# Altium PCB UWB_DWM1000_ParaChina.PcbDoc
Units mil, origin at the board's own origin, x right, y up, seen from the top; angles counter-clockwise.
Board outline 1968.5 x 2362.2 mil, 4 copper layers (Component Side, Signal Layer 2, Signal Layer 1, Solder Side), stack 33.235 mil thick; 66 components, 69 nets, 281 pads, 109 vias.
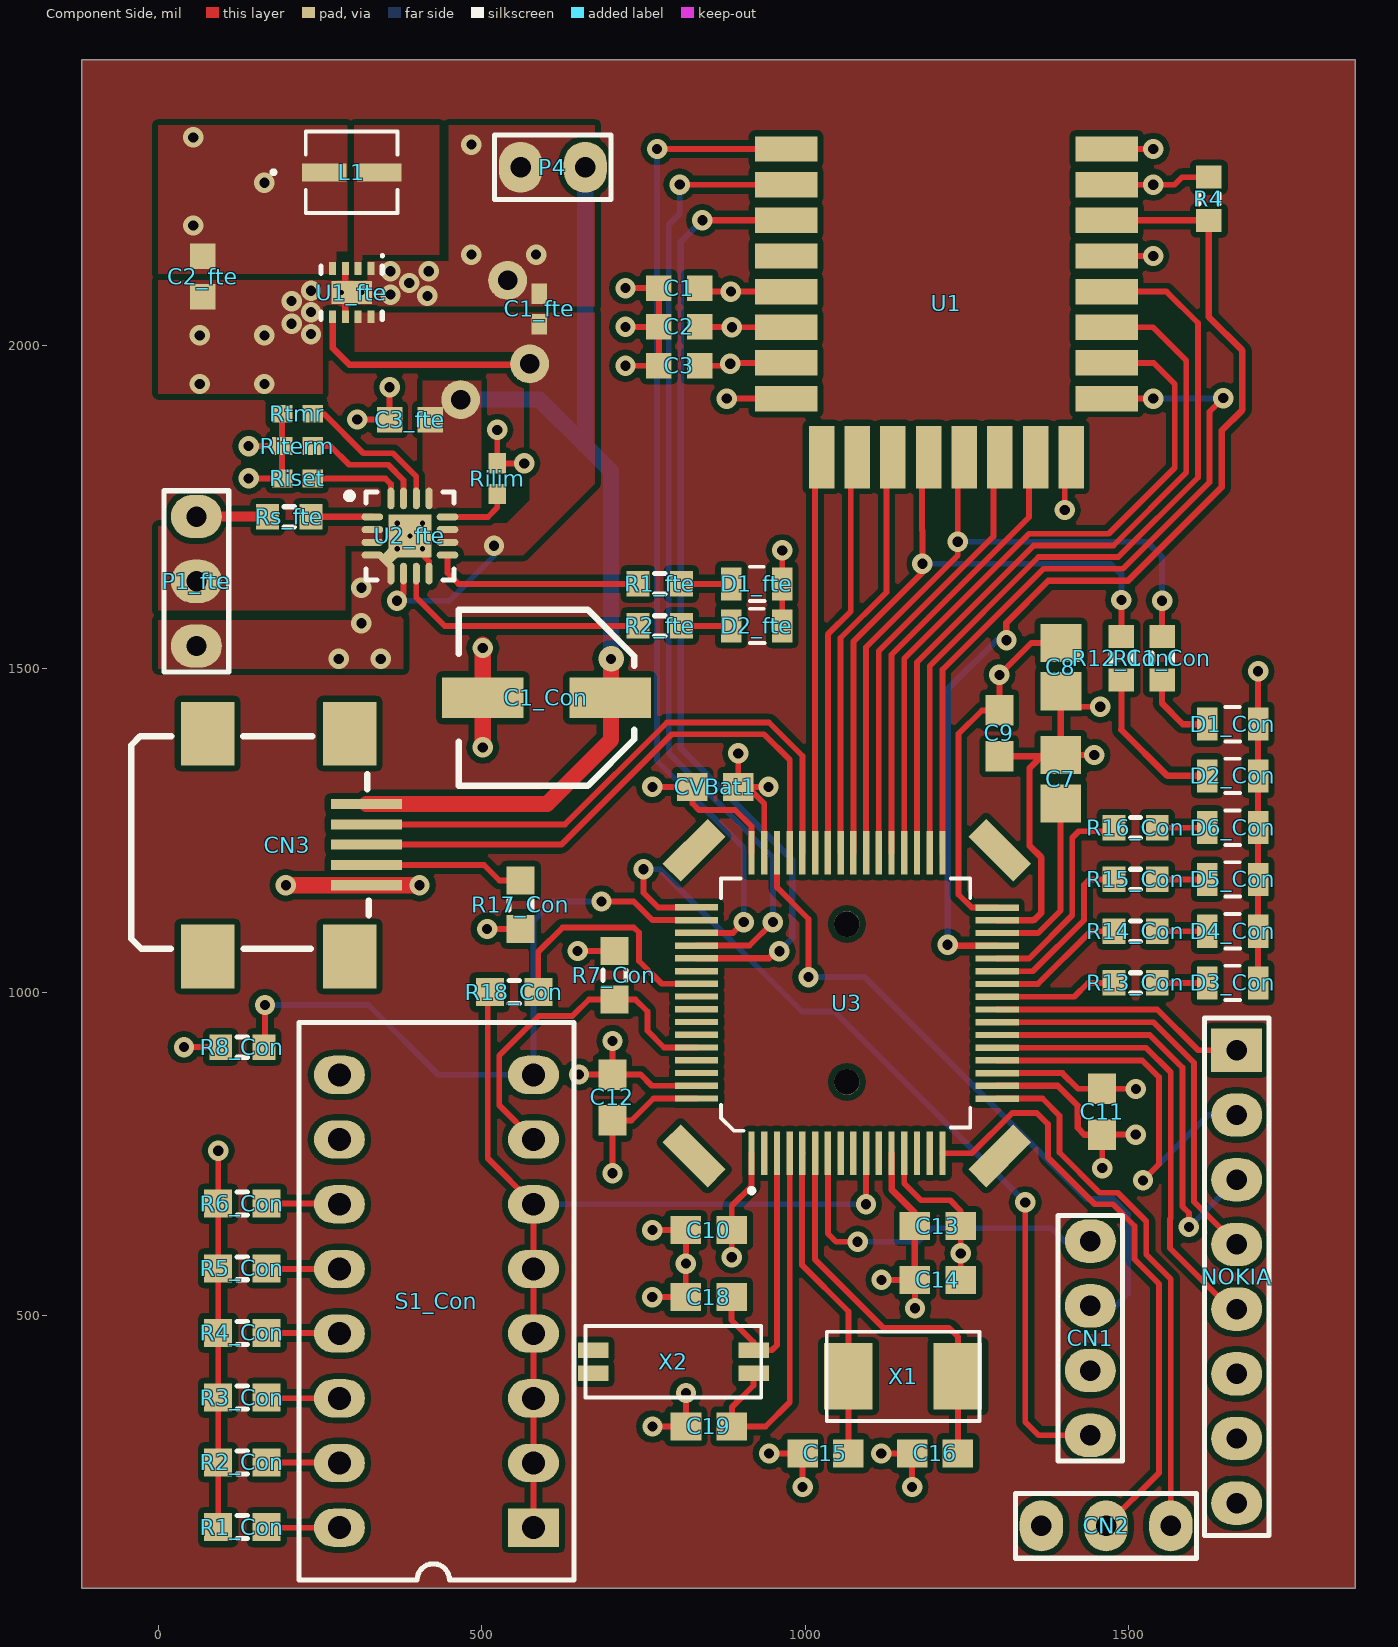
[diagram p0: Component Side view]
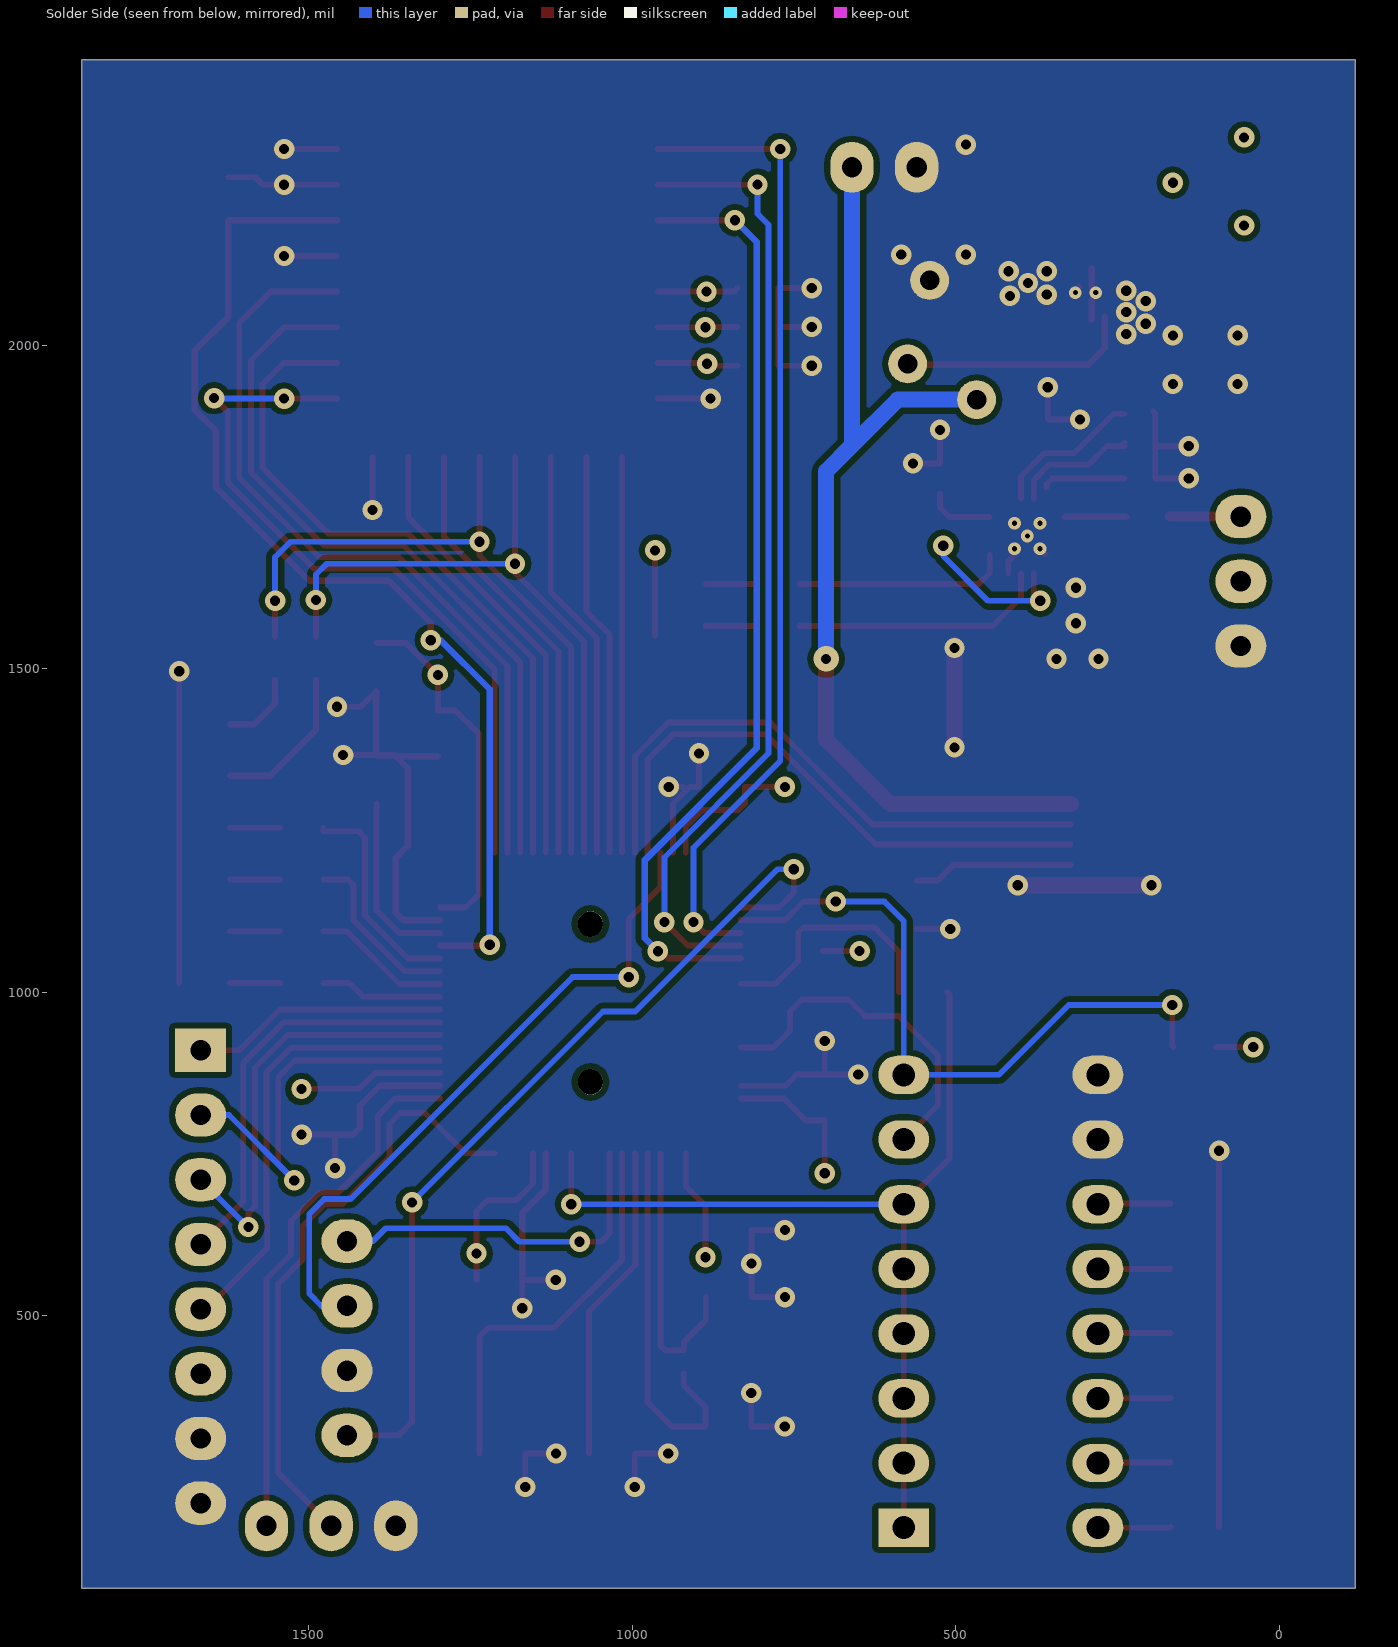
[diagram p1: Solder Side view, seen from below]
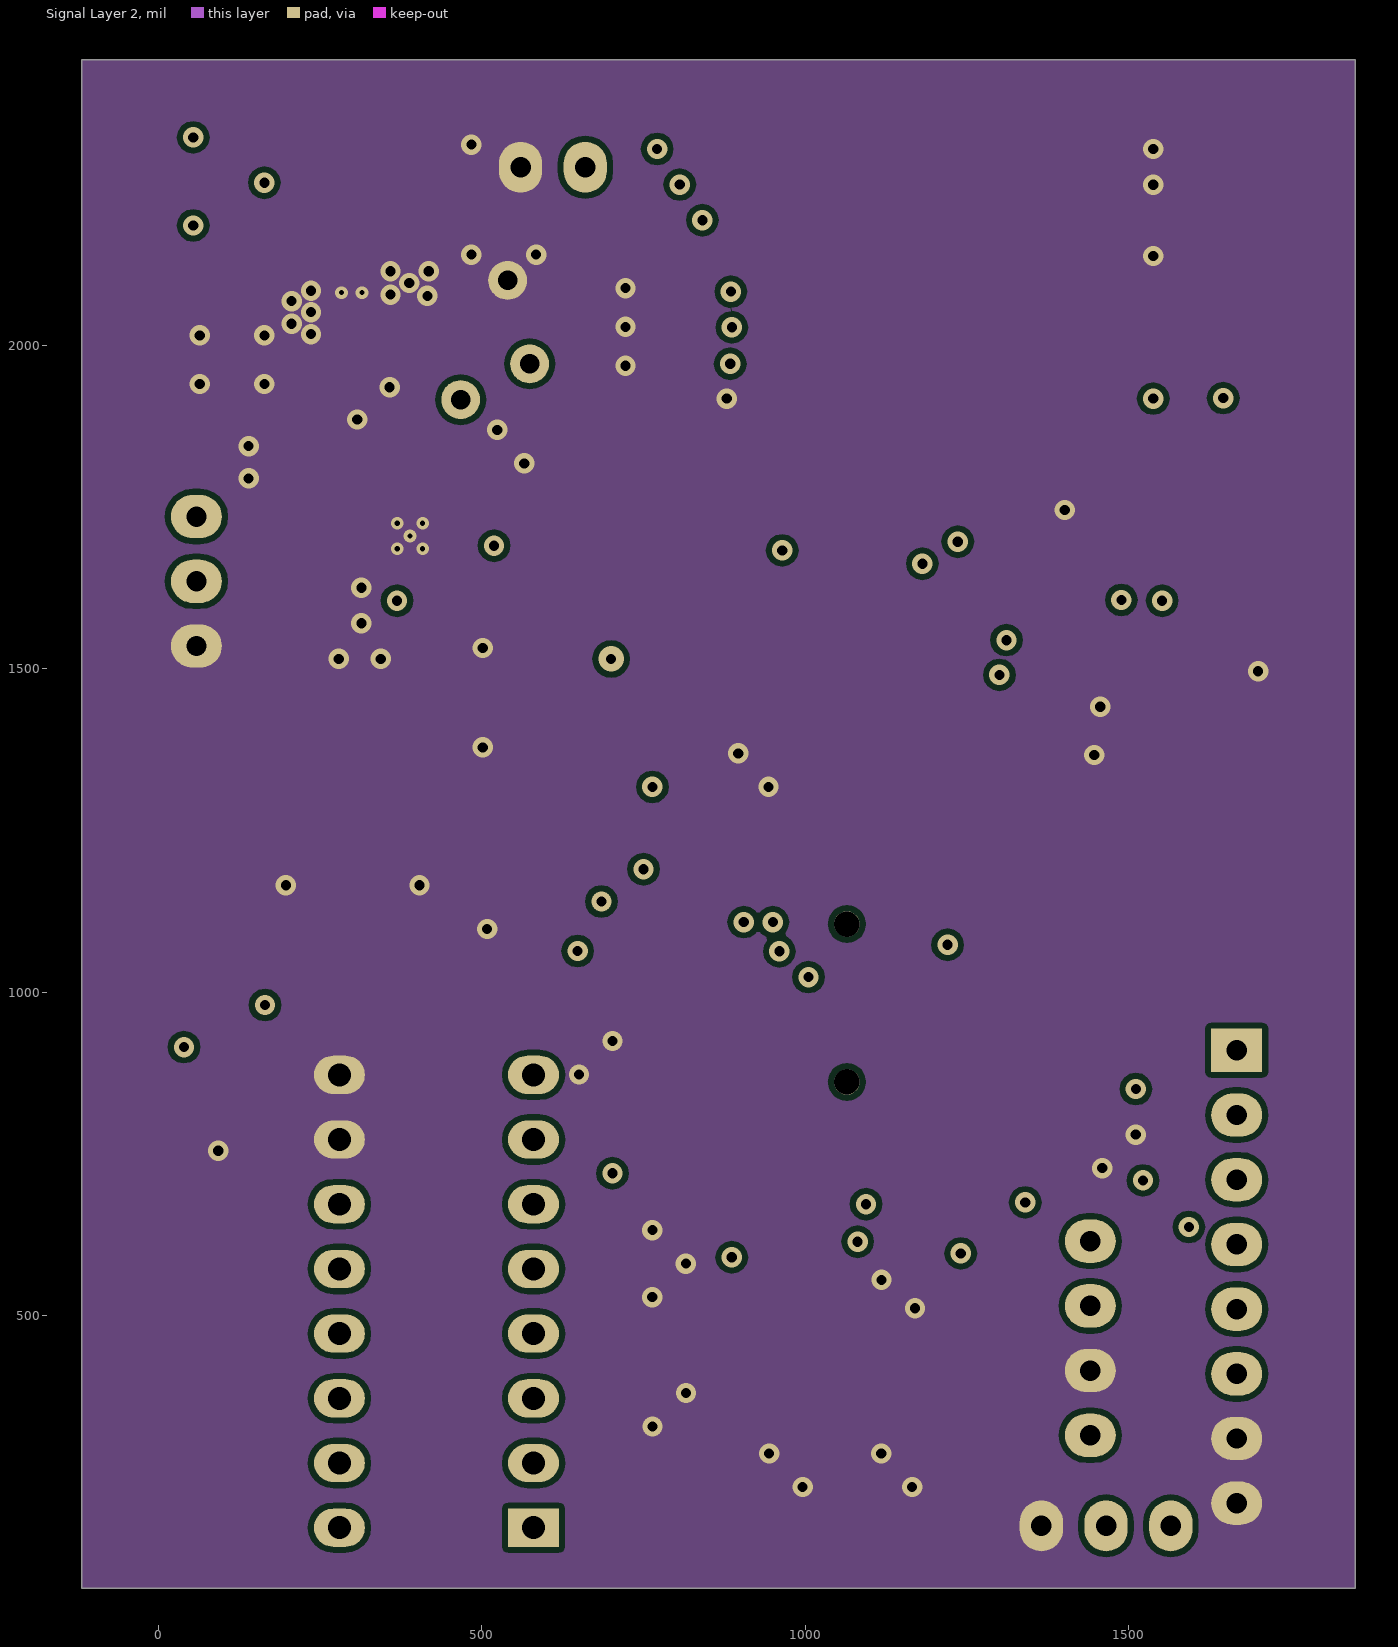
[diagram p2: Signal Layer 2]
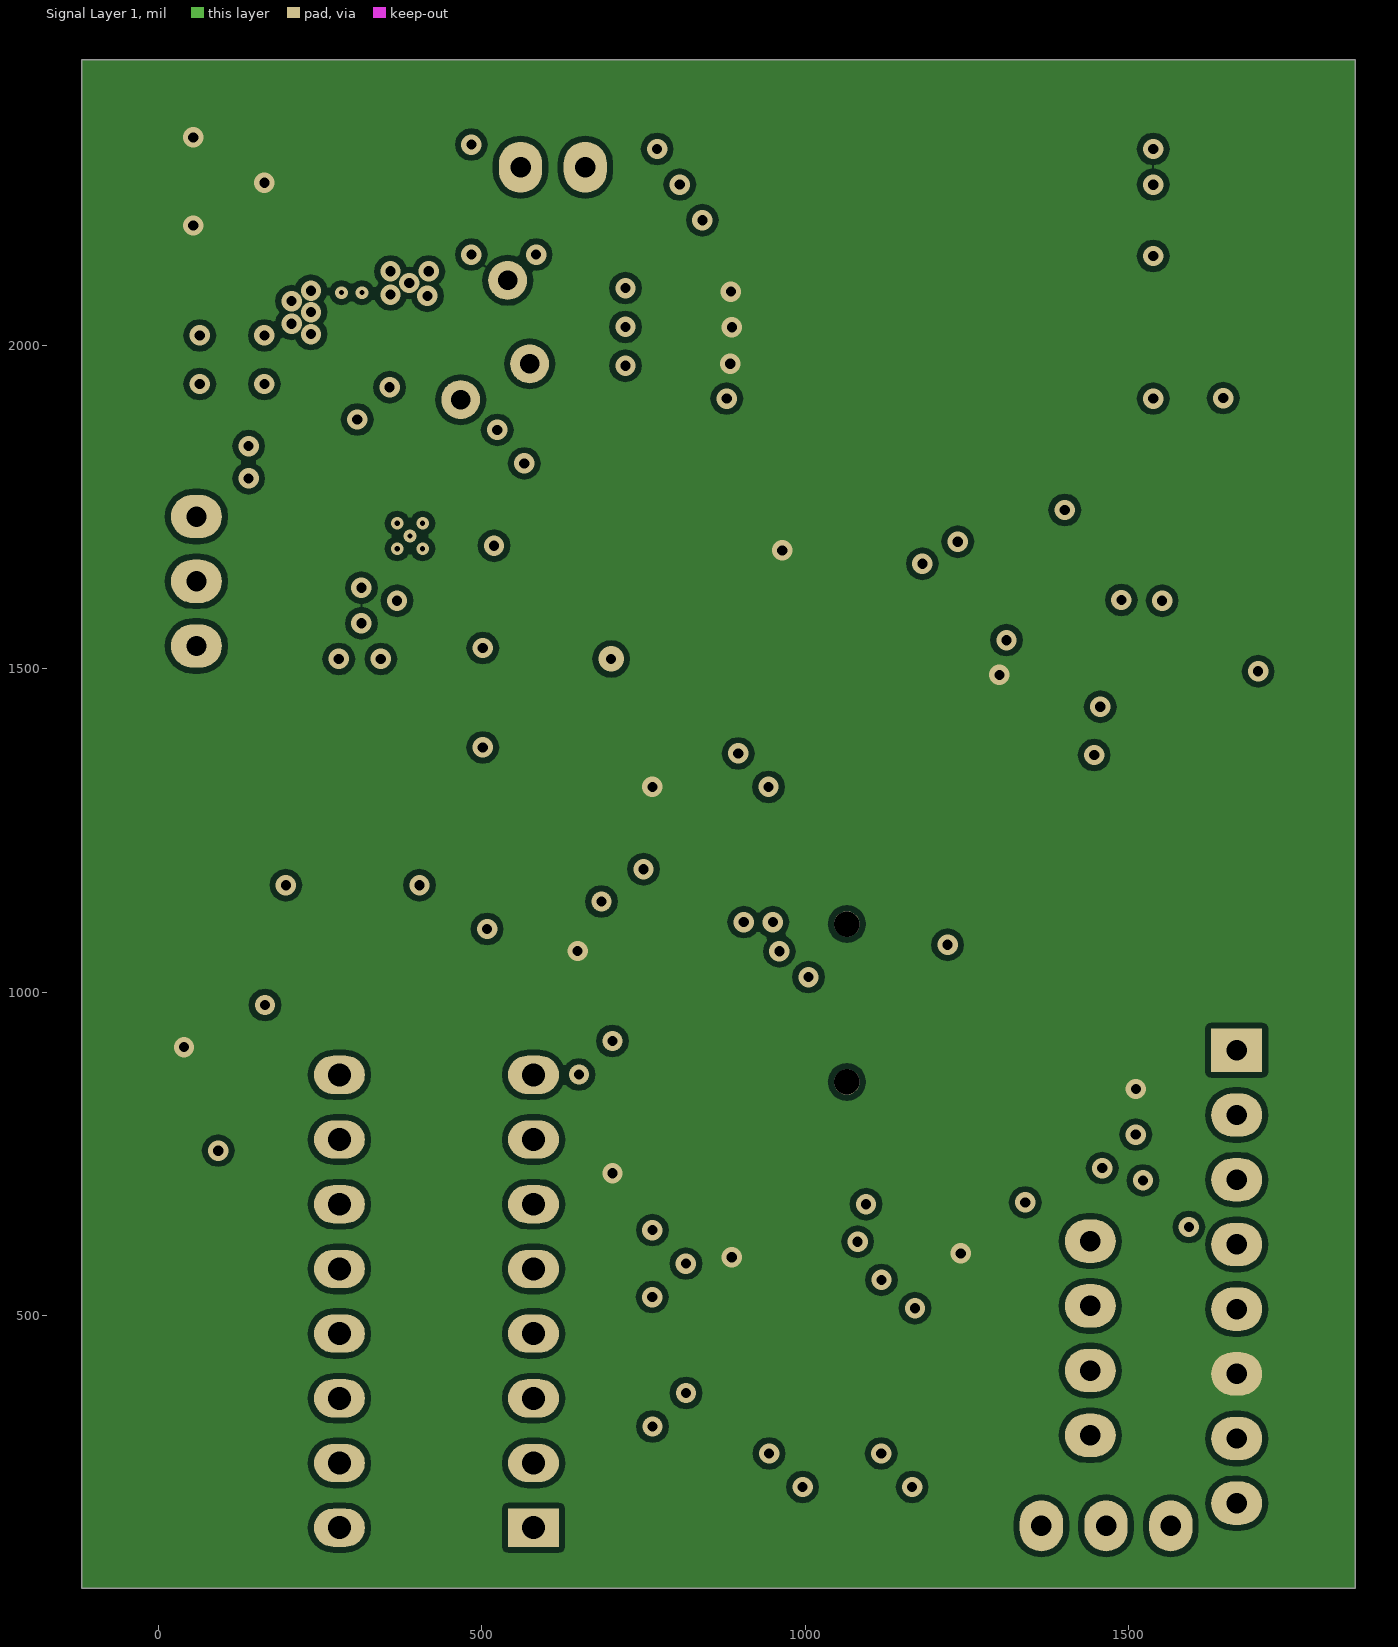
[diagram p3: Signal Layer 1]

## Layer stack, top to bottom
Top Solder: solder mask 0.4, Solder Resist, Dk 3.5
Component Side: signal copper 1.4
Dielectric 1: core 12.6, FR-4, Dk 4.8
Signal Layer 2: signal copper 1.4173
Dielectric 3: prepreg 5, Dk 4.2
Signal Layer 1: signal copper 1.4173
Dielectric 2: core 10, Dk 4.2
Solder Side: signal copper 1.4
Bottom Solder: solder mask 0.4, Solder Resist, Dk 3.5

## Board outline
-118.11,78.74 1850.39,78.74 1850.39,2440.94 -118.11,2440.94

## Design rules (kind name [scope] priority, off if disabled: settings)
Clearance Clearance_4 [InNamedPolygon('Top Layer-GND') vs HasFootprint('LQFP48_N') AND IsPad] p1: gap=15 ignorepadtopadclearanceinfootprint=FALSE except(0: Arc-Hole Track-Hole SMDPad-Hole THPad-Hole Via-Hole Fill-Hole Poly-Hole Region-Hole Text-Hole)
Clearance Clearance_3 [(InNamedPolygon('Top Layer-GND') OR InNamedPolygon('Top Layer-GND'))] p2: gap=15 ignorepadtopadclearanceinfootprint=FALSE except(0: Arc-Hole Track-Hole SMDPad-Hole THPad-Hole Via-Hole Fill-Hole Poly-Hole Region-Hole Text-Hole)
Clearance Clearance_2 [HasFootprint('LQFP48_N') AND IsPad vs IsTrack] p3: gap=6 ignorepadtopadclearanceinfootprint=FALSE except(0: Arc-Hole Track-Hole SMDPad-Hole THPad-Hole Via-Hole Fill-Hole Poly-Hole Region-Hole Text-Hole)
Clearance Clearance_1 [HasFootprint('LQFP64') AND IsPad vs HasFootprint('LQFP64') AND IsPad] p4: gap=6 ignorepadtopadclearanceinfootprint=FALSE except(0: Arc-Hole Track-Hole SMDPad-Hole THPad-Hole Via-Hole Fill-Hole Poly-Hole Region-Hole Text-Hole)
Clearance Clearance_5 [HasFootprint('DSG8-1600X900TP') AND IsPad vs HasFootprint('DSG8-1600X900TP') AND IsPad] p5: gap=6 ignorepadtopadclearanceinfootprint=FALSE except(0: Arc-Hole Track-Hole SMDPad-Hole THPad-Hole Via-Hole Fill-Hole Poly-Hole Region-Hole Text-Hole)
Clearance Clearance_6 [InComponent('U2_fte') vs InComponent('U2_fte')] p6: gap=4.72 ignorepadtopadclearanceinfootprint=FALSE except(0: Arc-Hole Track-Hole SMDPad-Hole THPad-Hole Via-Hole Fill-Hole Poly-Hole Region-Hole Text-Hole)
Clearance [All] p7: gap=9 ignorepadtopadclearanceinfootprint=FALSE except(0: Arc-Hole Track-Hole SMDPad-Hole THPad-Hole Via-Hole Fill-Hole Poly-Hole Region-Hole Text-Hole)
ComponentClearance ComponentClearance_1 [InComponent('NOKIA')] p1: gap=0 collisioncheckmode=3 verticalgap=0 showdistances=FALSE
ComponentClearance [All] p2: gap=10 collisioncheckmode=3 verticalgap=10 showdistances=FALSE
PolygonConnect PolygonConnect_1 [isvia] p1: connectstyle=Direct reliefconductorwidth=10 reliefentries=4 polygonreliefangle="90 Angle" airgapwidth=10
PolygonConnect [All] p2: connectstyle=Direct reliefconductorwidth=10 reliefentries=4 polygonreliefangle="90 Angle" airgapwidth=10
RoutingVias [All] p1: holewidth=15.75 width=31.5 viastyle="Through Hole" minholewidth=15.75 minwidth=31.5 maxholewidth=15.75 maxwidth=31.5
SolderMaskExpansion [All] p1: expansion=4
Width [All] p1: maxlimit=30 minlimit=9 preferedwidth=9 minimp=50.000000 maximp=50.000000 favimp=50.000000
29 further rules are at their usual default settings.

## Classes and differential pairs
component class UWB_DWM1000: C1 C2 C3 R4 U1
component class UWB_STM32F411: C7 C8 C9 C10 C11 C12 C13 C14 C15 C16 C18 C19 C? CN? CVBat1 R12 R? SW? U3 U? X1 X2 X?
component class UWB_Conectores: C1_Con CN1 CN2 CN3 D1_Con D2_Con D3_Con D4_Con D5_Con D6_Con NOKIA P4 R1_Con R2_Con R3_Con R4_Con R5_Con R6_Con R7_Con R8_Con R11_Con R12_Con R13_Con R14_Con R15_Con R16_Con R17_Con R18_Con S1_Con
component class UWB_Fuente-Cargador: C1_fte C2_fte C3_fte D1_fte D2_fte L1 P1_fte R1_fte R2_fte Rilim Riset Riterm Rs_fte Rtmr U1_fte U2_fte

## Components (designator, comment, footprint, x,y, rotation, side; value= is the part's Value field where it differs from the comment)
C1 "Cap" CAPC1608N 805.37,2088.15 r180 top value=100nF
C1_Con "Cap Pol1" "PANASONIC SIZE D (DIA. 6.3)" 600,1455 r90 top value=47uFx16V
C1_fte "Cap" CAPC1005N 589.02,2056.09 r90 top value=GRM155R60J475ME87D
C2 "Cap" CAPC1608N 805.37,2028.15 r180 top value=1uF
C2_fte "Cap" CAPC1608N 69.02,2106.09 r270 top value=GRM188R60J106ME47D
C3 "Cap" CAPC1608N 805.37,1968.15 r180 top value=10uF
C3_fte "Cap" CAPC1608N 389,1885 r180 top value=GRM188R61A105KA61D
C7 "Cap" CAPC2012M 1394.78,1329 r270 top value=4.7uF
C8 "Cap" CAPC2012M 1395.15,1502.4 r90 top value=4.7uF
C9 "Cap" CAPC1608M 1300.15,1400 r90 top value=100nF
C10 "Cap" CAPC1608M 851,632.15 r0 top value=100nF
C11 "Cap" CAPC1608M 1459,815.15 r90 top value=100nF
C12 "Cap" CAPC1608M 702,837.15 r270 top value=100nF
C13 "Cap" CAPC1608M 1205,638.15 r0 top value=1uF
C14 "Cap" CAPC1608M 1205,555.15 r0 top value=100nF
C15 "Cap" CAPC1608M 1031.29,286.94 r180 top value=22pF
C16 "Cap" CAPC1608M 1200.58,286.94 r180 top value=22pF
C18 "Cap" CAPC1608M 850.72,528.63 r180 top value=22pF
C19 "Cap" CAPC1608M 851.15,328.63 r180 top value=22pF
CN1 "SWD" "HDR1X4 - SMALL" 1440.63,315 r90 top
CN2 "UART2" HDR1X3 1565,175 r180 top
CN3 "USB" USB_Montaje 188.43,1233.15 r270 top
CVBat1 "Cap" CAPC1608M 861,1317.15 r180 top value=100nF
D1_Con "LED" "LED SMD 0805" 1660.63,1414.15 r0 top
D1_fte "LED" "LED SMD 0805" 925,1631 r0 top
D2_Con "LED" "LED SMD 0805" 1660.63,1334.15 r0 top
D2_fte "LED" "LED SMD 0805" 925,1566 r0 top
D3_Con "LED" "LED SMD 0805" 1660.63,1014.15 r0 top
D4_Con "LED" "LED SMD 0805" 1660.63,1094.15 r0 top
D5_Con "LED" "LED SMD 0805" 1660.63,1174.15 r0 top
D6_Con "LED" "LED SMD 0805" 1660.63,1254.15 r0 top
L1 "Inductor" IHLP-1212AE 299.02,2267.09 r0 top value=IHLP1212AEER1R0M11
NOKIA "Header 8" HDR1X8 1666.89,560 r270 top
P1_fte "Batt" HDR1X3 59,1735 r270 top
P4 "Header 2" HDR1X2 560,2275 r0 top
R1_Con "10K" RESC1608M 130,173.15 r180 top
R1_fte "Res1" RESC1608N 775,1631 r0 top value=1K
R2_Con "10K" RESC1608M 130,273.15 r0 top
R2_fte "Res1" RESC1608N 775,1566 r0 top value=1K
R3_Con "10K" RESC1608M 130,373.15 r0 top
R4 "Res1" RESC1608N 1624,2226.15 r270 top value=10K
R4_Con "10K" RESC1608M 130,473.15 r0 top
R5_Con "10K" RESC1608M 130,573.15 r0 top
R6_Con "10K" RESC1608M 130,673.15 r0 top
R7_Con "10K" RESC1608M 705,1026.15 r270 top
R8_Con "10K" RESC1608N 130,915 r0 top
R11_Con "Res1" RESC1608N 1551.63,1516.15 r90 top value=330E
R12_Con "Res1" RESC1608N 1488.63,1516.15 r90 top value=330E
R13_Con "Res1" RESC1608N 1510.63,1014.15 r180 top value=330E
R14_Con "Res1" RESC1608N 1510.63,1094.15 r180 top value=330E
R15_Con "Res1" RESC1608N 1510.63,1174.15 r180 top value=330E
R16_Con "Res1" RESC1608N 1510.63,1254.15 r180 top value=330E
R17_Con "10K" RESC1608M 560,1135 r270 top value=100K
R18_Con "10K" RESC1608M 550,1000 r180 top value=0R
Rilim "Res1" RESC1005N 524,1793.62 r270 top value=CRCW04023K09FKED
Riset "Res1" RESC1005N 215,1794 r0 top value=CRCW04021K74FKED
Riterm "Res1" RESC1005N 215,1844 r0 top value=CRCW04021K43FKED
Rs_fte "Res1" RESC1608N 202.46,1734.53 r0 top value=ERJ-3RSFR10V
Rtmr "Res1" RESC1005N 215,1894 r0 top value=CRCW040256K2FKED
S1_Con "SW-DIP8" DIP-16-KEY 430,522.15 r90 top
U1 "DWM1000" DWM1000 962.3,1818.9 r0 top
U1_fte "TPS62063DSGR" DSG8-1600X900TP 299.02,2081.09 r270 top
U2_fte "BQ24232RGTR" RGT16-1700X1700TP 389,1705 r0 top
U3 "MCU_LQFP64" LQFP64 1064.37,983.15 r0 top
X1 "8MHz(16pF)" "XTAL ABM7" 1151.37,406.15 r180 top
X2 "8MHz(16pF)" "XTAL ABS13" 796.15,428.63 r180 top

## Footprints (in the part's own frame and the unit in brackets; to place one, negate y for a bottom-side part, rotate by r counter-clockwise, add the part's x,y. Pads: shape width x height; smd on the part's side, far side on the other; paste and mask are expansions set on the pad)
CAPC1005N [mm] "Chip Capacitor, Body 1.0x0.5mm, IPC Medium Density"
  rect 0.8x0.6 smd: 1(-0.6,0) 2(0.6,0)
  body extent -0.55,-0.3 0.55,0.3, height 0.6
CAPC1608M [mm] "Chip Capacitor, Body 1.6x0.8mm, IPC Low Density"
  rect 1.2x1.1 smd: 1(-0.9,0) 2(0.9,0)
  body extent -0.87,-0.48 0.87,0.48, height 0.85
CAPC1608N [mm] "Chip Capacitor, Body 1.6x0.8mm, IPC Medium Density"
  rect 1x1 smd: 1(-0.8,0) 2(0.8,0)
  body extent -0.87,-0.48 0.87,0.48, height 0.85
CAPC2012M [mm] "Chip Capacitor, Body 2.0x1.3mm, IPC Low Density"
  rect 1.5x1.6 smd: 1(-0.95,0) 2(0.95,0)
  body extent -1.1,-0.72 1.1,0.72, height 1.1
DIP-16-KEY [mm] "DIP; 16 Leads; Row Spacing 7.62 mm; Pitch 2.54 mm"
  rect 1.5x2 hole 0.9: 1(-8.89,-3.81)
  oval 1.5x2 hole 0.9: 2(-6.35,-3.81) 3(-3.81,-3.81) 4(-1.27,-3.81) 5(1.27,-3.81) 6(3.81,-3.81) 7(6.35,-3.81) 8(8.89,-3.81) 9(8.89,3.81) 10(6.35,3.81) 11(3.81,3.81) 12(1.27,3.81) 13(-1.27,3.81) 14(-3.81,3.81) 15(-6.35,3.81) 16(-8.89,3.81)
  silkscreen extent -10.94,-5.4 10.94,5.39, body extent -10.85,-5.1 11.05,5.06, height 6.9
DSG8-1600X900TP [mm] "SON, 8-Leads, Body 2x2mm, Pitch 0.5mm, Thermal Pad 1.6x0.9mm, TI Recommended"
  rect 0.5x0.28 smd paste-0.14 mask+0.07: 1(-0.95,0.75) 2(-0.95,0.25) 3(-0.95,-0.25) 4(-0.95,-0.75) 5(0.95,-0.75) 6(0.95,-0.25) 7(0.95,0.25) 8(0.95,0.75)
  rect 0.9x1.6 smd paste-0.45 mask+0.07: 9(0,0)
  silkscreen extent -1.5,-1.2 1.05,1.25, body extent -1.05,-1.05 1.05,1.05, height 0.8
DWM1000 [mm]
  rect 2.45x1 smd: 1(0.205,12.3) 2(0.205,10.9) 3(0.205,9.5) 4(0.205,8.1) 5(0.205,6.7) 6(0.205,5.3) 7(0.205,3.9) 8(0.205,2.5) 17(12.795,2.5) 18(12.795,3.9) 19(12.795,5.3) 20(12.795,6.7) 21(12.795,8.1) 22(12.795,9.5) 23(12.795,10.9) 24(12.795,12.3)
  rect 1x2.45 smd: 9(1.6,0.205) 10(3,0.205) 11(4.4,0.205) 12(5.8,0.205) 13(7.2,0.205) 14(8.6,0.205) 15(10,0.205) 16(11.4,0.205)
  body extent 0,-0.01 13,22.99, height 2.9
HDR1X2 [mm] "Connector; Header; 2 Position"
  oval 1.7x2 hole 0.8: 1(0,0) 2(2.54,0)
  silkscreen extent -1.02,-1.27 3.56,1.27
HDR1X3 [mm] "Connector; Header; 2 Position"
  oval 1.7x2 hole 0.8: 1(0,0) 2(2.54,0) 3(5.08,0)
  silkscreen extent -1.02,-1.27 6.1,1.27, body extent -1.26,-1.45 6.36,1.47, height 8.51
"HDR1X4 - SMALL" [mm]
  oval 1.7x2 hole 0.8: 1(0,0) 2(2.54,0) 3(5.08,0) 4(7.62,0)
  silkscreen extent -1.02,-1.27 8.64,1.27, body extent -1.27,-1.46 8.89,1.46, height 8.51
HDR1X8 [mm] "Connector; Header; 8 Position"
  rect 1.7x2 hole 0.8: 1(-8.89,0)
  oval 1.7x2 hole 0.8: 2(-6.35,0) 3(-3.81,0) 4(-1.27,0) 5(1.27,0) 6(3.81,0) 7(6.35,0) 8(8.89,0)
  silkscreen extent -10.16,-1.27 10.16,1.27, body extent -10.16,-1.25 10.16,1.25, height 8.6
IHLP-1212AE [mil]
  rect 69x28 smd: 1(-42.5,0) 2(42.5,0)
  silkscreen extent -124,-63 71,63, body extent -72,-59 72,59, height 79
"LED SMD 0805" [mm]
  rect 0.8x1.3 smd: A(-1,0) K(1,0)
  silkscreen extent -0.28,-0.67 0.3,0.67, body extent -1.01,-0.62 1.01,0.63, height 1.1
LQFP64 [mm]
  rect 1x2.5 smd rot 45: 0(-6,-6) 0(6,6)
  rect 1x2.5 smd rot 135: 0(-6,6) 0(6,-6)
  round 1 hole 1 unplated: 0(0,-3.1) 0(0,3.1)
  rect 0.25x1.7 smd: 1(-3.747,-5.901) 2(-3.247,-5.901) 3(-2.747,-5.901) 4(-2.247,-5.901) 5(-1.747,-5.901) 6(-1.247,-5.901) 7(-0.747,-5.901) 8(-0.247,-5.901) 9(0.253,-5.901) 10(0.753,-5.901) 11(1.253,-5.901) 12(1.753,-5.901) 13(2.253,-5.901) 14(2.753,-5.901) 15(3.253,-5.901) 16(3.753,-5.901) 33(3.753,5.902) 34(3.253,5.902) 35(2.753,5.902) 36(2.253,5.902) 37(1.753,5.902) 38(1.253,5.902) 39(0.753,5.902) 40(0.253,5.902) 41(-0.247,5.902) 42(-0.747,5.902) 43(-1.247,5.902) 44(-1.747,5.902) 45(-2.247,5.902) 46(-2.747,5.902) 47(-3.247,5.902) 48(-3.746,5.901)
  rect 1.7x0.25 smd: 17(5.901,-3.753) 18(5.901,-3.253) 19(5.901,-2.753) 20(5.901,-2.253) 21(5.901,-1.753) 22(5.901,-1.253) 23(5.901,-0.753) 24(5.901,-0.253) 25(5.901,0.247) 26(5.901,0.747) 27(5.901,1.247) 28(5.901,1.747) 29(5.901,2.247) 30(5.901,2.747) 31(5.901,3.247) 32(5.901,3.747) 49(-5.902,3.753) 50(-5.902,3.253) 51(-5.902,2.753) 52(-5.902,2.253) 53(-5.902,1.753) 54(-5.902,1.253) 55(-5.902,0.753) 56(-5.902,0.253) 57(-5.902,-0.247) 58(-5.902,-0.747) 59(-5.902,-1.247) 60(-5.902,-1.747) 61(-5.902,-2.247) 62(-5.902,-2.746) 63(-5.902,-3.246) 64(-5.902,-3.746)
  silkscreen extent -4.94,-7.42 4.84,4.89, body extent -5,-6 5,6, height 1.5
"PANASONIC SIZE D (DIA. 6.3)" [mm]
  rect 1.6x3.2 smd: 1(0,-2.5) 2(0,2.5)
  silkscreen extent -3.45,-3.45 3.45,3.45, body extent -3.3,-3.5 3.3,3.5, height 5.4
RESC1005N [mm] "Chip Resistor, Body 1.1x0.5mm, IPC Medium Density"
  rect 0.8x0.7 smd: 1(-0.6,0) 2(0.6,0)
  body extent -0.55,-0.3 0.55,0.3, height 0.4
RESC1608M [mm] "Chip Resistor, Body 1.6x0.8mm, IPC Low Density"
  rect 1.1x1.1 smd: 1(-0.95,0) 2(0.95,0)
  silkscreen extent -0.2,-0.45 0.2,0.45, body extent -0.85,-0.48 0.85,0.48, height 0.6
RESC1608N [mm] "Chip Resistor, Body 1.6x0.8mm, IPC Medium Density"
  rect 0.9x1 smd: 1(-0.85,0) 2(0.85,0)
  silkscreen extent -0.2,-0.4 0.2,0.4, body extent -0.85,-0.48 0.85,0.48, height 0.6
RGT16-1700X1700TP [mm] "QFN, 16-Leads, Body 3x3mm, Pitch 0.5mm, Thermal Pad 1.7x1.7mm, TI Recommended"
  oval 0.85x0.28 smd paste-0.025 mask+0.07: 1(-1.475,0.75) 2(-1.475,0.25) 3(-1.475,-0.25) 4(-1.475,-0.75) 9(1.475,-0.75) 10(1.475,-0.25) 11(1.475,0.25) 12(1.475,0.75)
  oval 0.28x0.85 smd paste-0.025 mask+0.07: 5(-0.75,-1.475) 6(-0.25,-1.475) 7(0.25,-1.475) 8(0.75,-1.475) 13(0.75,1.475) 14(0.25,1.475) 15(-0.25,1.475) 16(-0.75,1.475)
  rect 1.7x1.7 smd paste-0.85 mask+0.07: 17(0,0)
  silkscreen extent -2.5,-1.73 1.73,1.73, body extent -1.57,-1.57 1.58,1.58, height 1
USB_Montaje [mm] "Conector USB de montaje superficial"
  rect 0.4x2.8 smd: 1(-1.46,3.39) 2(-0.664,3.39) 3(0.132,3.39) 4(0.929,3.39) 5(1.725,3.39)
  rect 2.5x2.1 smd: SHI(-4.225,2.725) SHI(-4.225,-2.85) SHI(4.525,2.725) SHI(4.525,-2.85)
  silkscreen extent -4.13,-5.85 4.22,3.48, body extent -5.2,-5.65 5.5,3.55, height 3.95
"XTAL ABM7" [mm] "Cristal de cuarzo de montaje superficial"
  rect 1.9x2.6 smd: 1(-2.15,0) 2(2.15,0)
  silkscreen extent -3,-1.75 3,1.75, body extent -3.1,-1.85 3.1,1.85, height 1.44
"XTAL ABS13" [mm] "Cristal de cuarzo de montaje superficial"
  rect 1.2x0.6 smd: 1(-3.15,-0.45) 2(-3.15,0.45) 3(3.15,0.45) 4(3.15,-0.45)
  silkscreen extent -3.45,-1.4 3.45,1.4, body extent -3.45,-0.75 3.45,0.75, height 1.4

## Part data
C1 C1_fte C2 C2_fte C3 C3_fte C7 C8 C9 C10 C11 C12 C13 C14 C15 C16 C18 C19 CVBat1: "Capacitor", LatestRevisionDate=17-Jul-2002, LatestRevisionNote="Re-released for DXP Platform.", PackageReference=RAD-0.3, Published=8-Jun-2000, Publisher="Altium Limited"
  C7 C8: PackageDescription="Radial Cap, Thru-Hole; 2 Leads; 0.3 in Pin Spacing", PN=CC0805KRX5R6BB475, PN 2=CA3279960, Proveedor="Future Electronics", Proveedor 2=Elemon
  C9 C10 C11 C12 C14 CVBat1: PackageDescription="Radial Cap, Thru-Hole; 2 Leads; 0.3 in Pin Spacing", PN=CC0603KRX7R6BB104, PN 2=CA3289100, Proveedor="Future Electronics", Proveedor 2=Elemon
  C13: PackageDescription="Radial Cap, Thru-Hole; 2 Leads; 0.3 in Pin Spacing", PN=CC0603KRX5R5BB105, PN 2=CA3289821, Proveedor="Future Electronics", Proveedor 2=Elemon
  C15 C16 C18 C19: PackageDescription="Radial Cap, Thru-Hole; 2 Leads; 0.3 in Pin Spacing", PN=0603YA220KAT2A, PN 2=CA3288483, Proveedor="Future Electronics", Proveedor 2=Elemon
C1_Con: "Polarized Capacitor (Radial)", LatestRevisionDate=17-Jul-2002, LatestRevisionNote="Re-released for DXP Platform.", PackageReference=RB7.6-15, Published=8-Jun-2000, Publisher="Altium Limited"
CN1: library part "Header 4", "Header, 4-Pin", LatestRevisionDate=17-Jul-2002, LatestRevisionNote="Re-released for DXP Platform.", PN 2=CN1, Publisher="Altium Limited"
CN2: library part "Header 3", "Header, 3-Pin", LatestRevisionDate=17-Jul-2002, LatestRevisionNote="Re-released for DXP Platform.", PN 2=CN3, Publisher="Altium Limited"
CN3: library part "USB-MINI-typeB connector", "USB-MINI-typeB connector", Manuf_Part_1=5075BMR-05-SM, ECCN=????, Order=5075BMR-05-SM, PN 2=CN2, Proveedor="Future Electronics", Proveedor 2=Elemon
D1_Con D1_fte D2_Con D2_fte D3_Con D4_Con D5_Con D6_Con: "Typical INFRARED GaAs LED", LatestRevisionDate=08-Jul-2005, LatestRevisionNote="Mech Layer 1 removed.", Published=8-Jun-2000, Publisher="Altium Limited"
P1_fte: library part "Header 3", "Header, 3-Pin MCU", LatestRevisionDate=17-Jul-2002, LatestRevisionNote="Re-released for DXP Platform.", Publisher="Altium Limited"
P4: "Header, 2-Pin", LatestRevisionDate=17-Jul-2002, LatestRevisionNote="Re-released for DXP Platform.", Publisher="Altium Limited"
R1_Con R2_Con R3_Con R4_Con R5_Con R6_Con R7_Con R8_Con R17_Con R18_Con: library part res1, "Resistor", Proveedor="Future Electronics", Proveedor 2=Elemon, Published=8-Jun-2000, Publisher="Altium Limited", Revision="July-2002: Re-released for DXP Platform."
  R1_Con R2_Con R3_Con R4_Con R5_Con R6_Con R7_Con R8_Con R17_Con: PN=RC0603JR-0710KL, PN 2=RS3866245
  R18_Con: PN 2=RS3895900
R1_fte R2_fte R4 R11_Con R12_Con R13_Con R14_Con R15_Con R16_Con Rilim Riset Riterm Rs_fte Rtmr: "Resistor", LatestRevisionDate=17-Jul-2002, LatestRevisionNote="Re-released for DXP Platform.", PackageReference=AXIAL-0.3, Published=8-Jun-2000, Publisher="Altium Limited"
S1_Con: "4009 Series DIP Switch, Raised actuator", ComponentLink1Description="Manufacturer Link", ComponentLink1URL=http://www.oupiin.com/prodindx.html#Headers, LatestRevisionDate=17-Dec-2003, LatestRevisionNote="PCB Footprint replaced.", PackageDescription="DIP; 16 Leads; Row Spacing 7.62 mm; Pitch 2.54 mm", PackageReference=DIP-16-KEY, Published=24-Mar-1999, Publisher="Altium Limited"
U1: "MOD IEEE802.15.4-2011 UWB TXRX", Current - Receiving=64mA, Current - Transmitting=31mA, Frequency="3.5GHz ~ 6.5GHz", Manufacturer="Decawave Limited", Operating Temperature="-40°C ~ 85°C", Package / Case=Module, Power - Output=-, Supplier Part Number 1=1479-1002-1-ND, Voltage - Supply="2.8 V ~ 3.6 V", Antenna Type="Integrated, Chip", Category="RF/IF and RFID", ComponentLink1Description=http://www.decawave.com/sites/default/files/product-pdf/dwm1000-product-brief.pdf, ComponentLink1URL=http://www.decawave.com/sites/default/files/product-pdf/dwm1000-product-brief.pdf, Data Rate=6.8Mbps, Manufacturer Part Number=DWM1000, Memory Size=-, Modulation=-, Mounting Type="Surface Mount", Packaging="Cut Tape (CT)", Pricing 1="1=32.16, 10=26.704, 100=24.24, 250=22.51296 (USD)", Protocol=-, RF Family/Standard=802.15.4, RoHS="RoHS Compliant", Sensitivity=-, Serial Interfaces=SPI, Stock 1=1028, Supplier 1=Digi-Key
U1_fte: "Buck Step Down Regulator with 2.7 to 6 V Input and 3.3 V Output, -40 to 85 degC, 8-Pin WSON (DSG), Green (RoHS & no Sb/Br)", Manufacturer="Texas Instruments", Rating=Catalog, Supplier Part Number 1=TPS62063DSGR-ND, Switch Current Limit(Typ)(A)=2.25, Code_JEDEC=MO-229, ComponentLink1Description=Datasheet, ComponentLink1URL=http://www.ti.com/general/docs/lit/getliterature.tsp?genericPartNumber=TPS62063&fileType=pdf, ComponentLink2Description="URL Link1", ComponentLink2URL="Samples URL:http://www.ti.com/product/tps62063#samples", DatasheetVersion=SLVSA95A, Duty Cycle(Max)(%)=100, Eco-Plan="Green (RoHS & no Sb/Br)", Iout(Max)(A)=1.6, Iq(Typ)(mA)=0.018, Mounting Technology="Surface Mount", PackageDescription="8-Pin Plastic Small Outline No-Lead, 2 x 2 x 0.8 mm Body, 0.5 mm Pitch, Exposed Pad", PackageReference=DSG8-1600X900TP, PackageVersion="revB, Oct-2010", PartNumber=TPS62063DSGR, Preset Vout(V)=3.3, Regulated Outputs(#)=1, SubFamily="Step-Down Regulator", Supplier 1=Digi-Key, Supplier 2=Mouser, Supplier Part Number 2=595-TPS62063DSGR, Synchronous Rectification=TRUE, Topology=Buck, Vin(Max)(V)=6, Vin(Min)(V)=2.7, Vout(Max)(V)=3.3, Vout(Min)(V)=3.3
U2_fte: "USB Friendly 0.5 A Li+ Charger with Dynamic Power Management, 10.5 V OVP, 4.3 V, -40 to 85 degC, 16-pin QFN (RGT), Green (RoHS & no Sb/Br)", Manufacturer="Texas Instruments", Over Voltage Protection=N, Supplier Part Number 1=BQ24232RGTR-ND, Code_JEDEC=MO-220, ComponentLink1Description=Datasheet, ComponentLink1URL=http://www.ti.com/general/docs/lit/getliterature.tsp?genericPartNumber=BQ24232&fileType=pdf, DatasheetVersion=SLUS821C, Eco-Plan="Green (RoHS & no Sb/Br)", Lead Acid=N, Li-Ion=N, Li-Polymer=N, Mounting Technology="Surface Mount", NiCd=N, NiMH=N, PackageDescription="16-Pin Plastic Quad Flat No-Lead, 3 x 3 mm Body, 0.5 mm Pitch, 1.7 x 1.7 mm Exposed Pad", PackageReference=RGT16-1700X1700TP, PackageVersion="revH, Oct-2011", PartNumber=BQ24232RGTR, SubFamily="Battery Charge Management", Supplier 1=Digi-Key, Supplier 2=Mouser, Supplier Part Number 2=595-BQ24232RGTR, Vin(Min)(V)=4.3
X1 X2: library part CRYSTAL, "Crystal", PN=ABM7-8.000MHZ-D2Y-T, PN 2=X1, Proveedor="Future Electronics"
L1: Code_IEC=1005, Code_JEITA=0402, LatestRevisionDate=17-Jul-2002, LatestRevisionNote="Re-released for DXP Platform.", PackageReference=0402-A, Published=8-Jun-2000, Publisher="Altium Limited"
U3: PN 2=STM32F411RE

## Free pads (board coordinates)
  round 60 hole 30: 2(467.39,1915.79) 2(540,2100) 2(574.02,1971.09)
  rect 39.37x19.68 smd rot 45: 3(361.16,1677.16)

## Via types
v1: diameter 31.5, hole 15.75, Component Side to Solder Side, tented both sides, 98 vias
v2: diameter 19.68, hole 7.87, Component Side to Solder Side, tented top, 5 vias
v3: diameter 31.5, hole 15.75, Component Side to Solder Side, 3 vias
v4: diameter 19.68, hole 7.87, Component Side to Solder Side, 2 vias
v5: diameter 39.37, hole 15.75, Component Side to Solder Side, tented both sides, 1 vias

## Nets (pads, with @x,y where several pads share a name; then routed paths per layer and width w, separated by ;. In a path a pad name is that pad's centre, name@x,y a point inside that pad or via, vN(x,y) a via of type N, cw(c..) or ccw(c..) an arc to the next point about the centre after c; other vN are vias at no path point)
+3.3V: C1.1 C2.1 C2_fte.1 C3.1 C8.2 C9.2 C10.2 C11.2 C12.2 C13.2 C14.2 CVBat1.2 D1_fte.K D2_fte.K L1.1 NOKIA.6 R7_Con.1 R8_Con.1 U1.5 U1.6 U1.7 U1_fte.4 U3.1 U3.13 U3.19 U3.32 U3.48 U3.64 | length 2300.4
  Component Side w9: v1(39.75,915) R8_Con.1 ; v1(648.21,1063.55) R7_Con.1 ; v1(702,719.93) C12.2 731.57,801.72 765.5,835.65 U3.64 ; v1(763.78,1317.15) CVBat1.2 825.57,1291.58 835.56,1281.59 891.56,1281.59 916.87,1256.28 U3.48 ; C3.1 881,1968.15 v1(884,1971.15) 885.29,1972.44 U1.7@960.37,1972.44 ; C2.1 885.99,2028.15 v1(886.58,2027.56) U1.6@960.37,2027.56 ; C1.1 841.87,2083.15 884.53,2083.15 v1(885,2082.68) U1.5@960.37,2082.68 ; v1(886.43,590.15) C10.2 886.43,669.58 916.87,700.02 U3.1 ; D2_fte.K@964.37,1551 D2_fte.K D1_fte.K v1(964.37,1682.79) ; U3.13 1153.09,704.06 1179,678.15 1224,678.15 1240.43,661.72 C13.2 v1(1240.43,596.15) C14.2 ; U3.19 1397.4,874.74 1421.57,850.58 C11.2 v1@1510.57,850.58 ; U3.32 1257.35,1130.65 1237,1151 1237,1399.37 1273.06,1435.43 C9.2 v1(1300.15,1490.37) 1349.58,1539.8 C8.2
  other v1: 1511,850.15 54,2185 164.02,2251.09 54.02,2321.09
+VBAT: P1_fte.2 U2_fte.2 U2_fte.3
+VIN: C1_fte.1 pad.2@574.02,1971.09 U1_fte.5 U1_fte.7 U1_fte.8 U2_fte.6 U2_fte.10 U2_fte.11 | length 604
  Component Side w9: v1(369,1605) 379.16,1615.16 U2_fte.6
  Component Side w10: U1_fte.5 269.49,1995.51 295,1970 pad.2@574.02,1970
  Solder Side w9: v1(369,1605) 450,1605 519,1674 v1(519,1690)
ADDR: R18_Con.2 S1_Con.1 S1_Con.2 S1_Con.3 S1_Con.4 S1_Con.5 S1_Con.6 U3.10 | length 1454.2
  Component Side w9: R18_Con.2 509.13,996.53 509.13,743.02 S1_Con.6 S1_Con.5 S1_Con.4 S1_Con.3 S1_Con.2 S1_Con.1 ; U3.10 1094.03,679.11 v1@1095,678.15
  Solder Side w9: S1_Con.3 S1_Con.3@586,378.15 ; S1_Con.6 v1(1094,672.15)
BOOT0: R7_Con.2 S1_Con.7 U3.60 | length 541
  Component Side w9: S1_Con.7 527.13,825.02 527.13,902.13 588.15,963.15 640,963.15 665.6,988.75 R7_Con.2 737.4,988.75 756,970.15 756,940.15 781.76,914.39 U3.60
DW_CLK: U1.20 U3.34 | length 1233.6
  Component Side w9: U3.34 1192.46,1504.18 1360.68,1672.4 1483.83,1672.4 1607,1795.56 1607,2034.15 1558.47,2082.68 U1.20 U1.20@1456.04,2082.68
DW_CS: U1.17 U3.33 | length 1153.8
  Component Side w9: U3.33 1212.14,1498.41 1368.13,1654.4 1491.29,1654.4 1625,1788.11 1625,1897.15 v1(1646,1918.15) ; U1.17@1456.04,1917.32 U1.17 v1(1537.83,1917.32)
  Solder Side w9: v1(1537.83,1917.32) 1645.17,1917.32 v1(1646,1918.15) v1@1655,1918.15
DW_EXTON: U1.1 U3.51 | length 1519.7
  Component Side w9: v1(771,2303.15) U1.1@960.37,2303.15 ; U3.51 888.41,1091.55 v1(905,1108.15)
  Solder Side w9: v1(771,2303.15) 771,1357.15 905,1223.15 v1(905,1108.15)
DW_IO0: U1.15 U3.37 | length 699.5
  Component Side w9: U3.37 1133.4,1521.49 1346,1734.09 U1.15@1346,1826.97
DW_IO1: U1.14 U3.38 | length 684.9
  Component Side w9: U3.38 1113.72,1527.26 1290.88,1704.43 U1.14@1290.88,1826.97
DW_IO2: R11_Con.2 U1.13 U3.39 | length 1118.7
  Component Side w9: U3.39 1094.03,1533.03 1235.76,1674.76 v1(1235.76,1696.15) U1.13@1235.76,1826.97 ; R11_Con.2 v1(1551.63,1605)
  Solder Side w9: v1(1235.76,1696.15) 1527.93,1696.15 1551.63,1672.45 v1(1551.63,1605)
DW_IO3: R12_Con.2 U1.12 U3.40 | length 1066.2
  Component Side w9: U3.40 1074.35,1541.44 1181,1648.09 v1(1181,1662.15) 1181,1713.15 1180.65,1713.5 U1.12@1180.65,1826.97 ; R12_Con.2 v1(1488.63,1606.15)
  Solder Side w9: v1(1181,1662.15) 1472,1662.15 1488.63,1645.52 v1(1488.63,1606.15)
DW_IO4: U1.11 U3.41 | length 640.8
  Component Side w9: U3.41 1054.66,1547.21 1125.53,1618.07 U1.11@1125.53,1826.97
DW_IO5: U1.10 U3.42 | length 626.2
  Component Side w9: U3.42 1034.98,1552.98 1070.41,1588.41 U1.10@1070.41,1826.97
DW_IO6: U1.9 U3.43 | length 611.5
  Component Side w9: U3.43 U1.9@1015.29,1826.97
DW_IRQ: R4.2 U1.22 U3.29 | length 1656.1
  Component Side w10: v3(1220,1073.15) 1221.55,1071.59 U3.29 ; v1(1311,1544) 1311,1571.1 1375.8,1635.9 1498.95,1635.9 1643.5,1780.45 1643.5,1867.65 1675.75,1899.9 1675.75,1991.56 1623.77,2043.54 1623.77,2192.91 U1.22 U1.22@1456.04,2192.91
  Solder Side w10: v3(1220,1073.15) 1220,1468 1296,1544 v1(1311,1544)
DW_MISO: U1.19 U3.35 | length 1159.5
  Component Side w9: U3.35 1172.77,1509.95 1353.22,1690.4 1476.38,1690.4 1589,1803.02 1589,1976.15 1537.59,2027.56 U1.19 U1.19@1456.04,2027.56
DW_MOSI: U1.18 U3.36 | length 1098.2
  Component Side w9: U3.36 1153.09,1515.72 1345.77,1708.4 1468.92,1708.4 1571,1810.48 1571,1940.01 1538.57,1972.44 U1.18 U1.18@1456.04,1972.44
DW_RST: U1.3 U3.53 | length 1475.6
  Component Side w10: U3.53 944.04,1052.18 955,1063.15 v1(960,1063.15) ; v1(841,2193.15) 960.13,2193.15 U1.3@960.37,2192.91
  Solder Side w10: v1(841,2193.15) 807.5,2159.65 807.5,1376.81 980,1204.31 980,1083.15 v1(960,1063.15)
DW_WAKEUP: U1.2 U3.52 | length 1501.1
  Component Side w9: v1(806,2248.15) 806.12,2248.03 U1.2@960.37,2248.03 ; U3.52 913.72,1071.87 v1(950,1108.15)
  Solder Side w9: v1(806,2248.15) 806,2203.15 789,2186.15 789,1369.15 950,1208.15 v1(950,1108.15)
GND: C1.2 C1_Con.2 C1_fte.2 C2.2 C2_fte.2 C3.2 C3_fte.2 C7.1 C8.1 C9.1 C10.1 C11.1 C12.1 C13.1 C14.1 C15.2 C16.2 C18.2 C19.2 CN1.2 CN2.3 CN3.5 CVBat1.1 D1_Con.K D2_Con.K D3_Con.K D4_Con.K D5_Con.K D6_Con.K NOKIA.7 NOKIA.8 P1_fte.3 P4.1 pad.2@540,2100 pad.3 R1_Con.2 R2_Con.1 R3_Con.1 R4.1 R4_Con.1 R5_Con.1 R6_Con.1 R17_Con.2 Rilim.1 Riset.1 Riterm.1 Rtmr.1 S1_Con.9 S1_Con.10 U1.8 U1.16 U1.21 U1.23 U1.24 U1_fte.1 U1_fte.3 U1_fte.6 U1_fte.9 U2_fte.4 U2_fte.5 U2_fte.8 U2_fte.17 U3.12 U3.18 U3.31 U3.47 U3.63 | length 5005.3
  Component Side w9: R1_Con.2 R4_Con.1 R6_Con.1 v1(92.6,754.94) ; v1(139.59,1794) Riset.1 Riterm.1 ; v1(139.59,1844) Riterm.1 ; Rtmr.1@195,1897.62 Rtmr.1 Riterm.1 ; v1(307.62,1885) C3_fte.2 v1(357.5,1934.88) ; pad.3 v2(369.32,1685.31) ; v2(408.69,1685.32) 408.69,1675.75 418.53,1665.91 U2_fte.8 ; v1(508.21,1097.6) R17_Con.2 ; v1(524,1869.03) Rilim.1 v1(565.79,1817.24) ; v1(650.21,872.58) C12.1 ; v1(702,924.37) C12.1 ; v1(722.09,1968.15) C3.2 C2.2 ; v1(722.09,2028.15) C2.2 ; v1(722.09,2088.15) C1.2 C2.2 ; v1(763.5,528.63) C18.2 v1@815.28,580.42 ; v1(763.78,632.15) C10.1 v1(815.57,580.36) ; v1(763.93,328.63) C19.2 v1(815.72,380.42) ; U3.63 762.81,855.33 745.57,872.58 C12.1 ; v1(878.58,1917.32) U1.8@960.37,1917.32 ; v1(896.43,1368.94) CVBat1.1 911,1317.15 936.55,1291.59 U3.47 ; 921,1317.15 v1(943.22,1317.15) v1@948.22,1317.15 ; v1(944.07,286.94) C15.2 v1(995.86,235.15) ; v1(1117.36,286.94) C16.2 v1(1165.15,235.15) ; v1(1117.78,555.15) C14.1 v1(1169.57,511.36) ; C7.1 v1(1446.57,1366.4) ; C8.1 1419.15,1441 v1(1456,1441) ; v1(1401.12,1745.18) U1.16@1401.12,1826.97 ; U1.21@1456.04,2137.8 U1.21 v1(1537.83,2137.8) ; U1.23@1456.04,2248.03 U1.23 v1(1537.83,2248.03) 1570.88,2248.03 1582.46,2259.61 R4.1 ; U1.24@1456.04,2303.15 U1.24 v1(1537.83,2303.15) ; v1(1459,727.93) C11.1 v1(1510.79,779.72) ; D3_Con.K D4_Con.K D5_Con.K D6_Con.K D2_Con.K D1_Con.K v1(1700,1495.94)
  Component Side w10: U1_fte.6@289.17,2039.5 U1_fte.6 U1_fte.9@289.17,2069.5 ; U1_fte.9@289.17,2088.5 U1_fte.3 ; U1_fte.9@308.7,2090 U1_fte.9@310.7,2088 ; U3.12 1133.4,694.74 1169.57,658.58 C13.1 C14.1 ; U3.18 1390.09,855.06 1421,824.15 1421,790.15 1431.43,779.72 C11.1 ; U3.31 1352,1110.96 1353.19,1112.15 1354.66,1112.15 1365,1122.49 1365,1208 1346.63,1226.37 1346.63,1346 C7.1@1365.2,1364.57 ; C9.1 C7.1@1365.2,1364.57 ; C8.1 1395.15,1366.77 C7.1 1367.03,1366.4 C7.1@1365.2,1364.57
  Component Side w25: v1(197.27,1165.24) CN3.5 v1(403.68,1165.24) ; v1(501.57,1378.21) C1_Con.2 v1(501.57,1531.79) v1@501.57,1536.79
  other v1: 279,1515 344,1515 314,1570 314,1625 64,1940 164,1940 64,2015 164,2015 236.02,2017.09 206.02,2033.09 236.02,2051.09 206.02,2068.09 416.02,2076.09 359.02,2078.09 236.02,2084.09 388.02,2096.09 359.02,2114.09 418.02,2114.09 484,2140 584,2140 484,2310
  other v2: 389,1705 369.32,1724.68 408.69,1724.69
  other v4: 283.27,2081.09 314.76,2081.09
LCD_CD: NOKIA.3 U3.22 | length 661.8
  Component Side w9: U3.22 1532.54,933.8 1582.89,883.45 1582.89,668.54 1593,658.43 v1(1593,637)
  Solder Side w9: v1(1593,637) 1593.89,637 NOKIA.3
LCD_CLK: NOKIA.5 U3.21 | length 698.4
  Component Side w9: U3.21 1526.77,914.11 1564.89,876 1564.89,650.25 1563.75,649.11 1563.75,604.25 1658,510 NOKIA.5
LCD_CS: NOKIA.2 U3.20 | length 617.5
  Component Side w9: U3.20 1521,894.43 1546.89,868.54 1546.89,733.89 v1(1522,709)
  Solder Side w9: v1(1522,709) 1623,810 NOKIA.2
LCD_MOSI: NOKIA.4 U3.23 | length 638.3
  Component Side w9: U3.23 1538.31,953.48 1600.89,890.91 1600.89,676 NOKIA.4
LCD_RST: NOKIA.1 U3.24 | length 396.3
  Component Side w9: U3.24 1544.08,973.17 1607.25,910 NOKIA.1
LED1: R13_Con.2 U3.25 | length 189.3
  Component Side w9: U3.25 1415.85,992.85 1437.15,1014.15 R13_Con.2
LED2: R14_Con.2 U3.26 | length 214.3
  Component Side w9: U3.26 1359.54,1012.54 1441.15,1094.15 R14_Con.2
LED3: R15_Con.2 U3.27 | length 271.3
  Component Side w9: U3.27 1351.81,1032.22 1430.78,1111.19 1430.78,1166 1438.93,1174.15 R15_Con.2
LED4: R16_Con.2 U3.28 | length 337.9
  Component Side w9: U3.28 1346.04,1051.91 1412.78,1118.65 1412.78,1238.78 1422.57,1248.57 1477.17,1248.57 R16_Con.2
NetC7_2: C7.2 U3.30 | length 278
  Component Side w9: U3.30 1359.96,1091.28 1394.78,1126.1 C7.2
NetC18_1: C18.1 U3.3 X2.1 | length 432.3
  Component Side w9: C18.1 886.15,493 920.17,458.98 X2.1 948.35,446.35 956.24,454.24 U3.3
NetC19_1: C19.1 U3.4 X2.2 | length 585.9
  Component Side w9: X2.2 920.17,392.02 886.58,358.43 C19.1 938.63,328.63 975.92,365.92 U3.4
NetD1_Con_A: D1_Con.A R11_Con.1 | length 119.4
  Component Side w9: 1551.63,1446.15 R11_Con.1
  Component Side w10: 1551.63,1446.15 1583.63,1414.15 D1_Con.A
NetD1_fte_A: D1_fte.A R1_fte.2 | length 77.2
  Component Side w9: R1_fte.2 D1_fte.A
NetD2_Con_A: D2_Con.A R12_Con.1 | length 239.4
  Component Side w9: 1488.63,1405.52 R12_Con.1
  Component Side w10: 1488.63,1405.52 1560,1334.15 D2_Con.A
NetD2_fte_A: D2_fte.A R2_fte.2 | length 77.2
  Component Side w9: R2_fte.2 D2_fte.A
NetD3_Con_A: D3_Con.A R13_Con.1 | length 77.2
  Component Side w9: R13_Con.1 D3_Con.A
NetD4_Con_A: D4_Con.A R14_Con.1 | length 77.2
  Component Side w9: R14_Con.1 D4_Con.A
NetD5_Con_A: D5_Con.A R15_Con.1 | length 77.2
  Component Side w9: R15_Con.1 D5_Con.A
NetD6_Con_A: D6_Con.A R16_Con.1 | length 77.2
  Component Side w9: R16_Con.1 D6_Con.A
NetL1_2: L1.2 U1_fte.2
NetP1_fte_1: P1_fte.1 Rs_fte.1 | length 110.2
  Component Side w15: P1_fte.1 168.53,1735 Rs_fte.1
NetR1_Con_1: R1_Con.1 S1_Con.16 | length 113
  Component Side w9: R1_Con.1 168.4,172.15 S1_Con.16
NetR1_fte_1: R1_fte.1 U2_fte.9 | length 329
  Component Side w9: U2_fte.9 447.07,1647.93 464,1631 R1_fte.1
NetR2_Con_2: R2_Con.2 S1_Con.15 | length 113
  Component Side w9: R2_Con.2 279,273.15 S1_Con.15
NetR2_fte_1: R2_fte.1 U2_fte.7 | length 397.8
  Component Side w9: U2_fte.7 398.84,1610 442.84,1566 R2_fte.1
NetR3_Con_2: R3_Con.2 S1_Con.14 | length 113
  Component Side w9: R3_Con.2 168.4,372.15 S1_Con.14
NetR4_Con_2: R4_Con.2 S1_Con.13 | length 113
  Component Side w9: R4_Con.2 279,473.15 S1_Con.13
NetR5_Con_2: R5_Con.2 S1_Con.12 | length 113
  Component Side w9: R5_Con.2 168.4,572.15 S1_Con.12
NetR6_Con_2: R6_Con.2 S1_Con.11 | length 113
  Component Side w9: R6_Con.2 279,673.15 S1_Con.11
NetRilim_2: Rilim.2 U2_fte.12 | length 103.9
  Component Side w9: U2_fte.12 509.53,1734.53 524,1749 Rilim.2
NetRiset_2: Riset.2 U2_fte.16 | length 129.9
  Component Side w9: Riset.2 351,1794 359.47,1785.53 359.47,1780
NetRiterm_2: Riterm.2 U2_fte.15 | length 199.1
  Component Side w9: Riterm.2 Riterm.2@245,1844 ; Riterm.2@239,1850 Riterm.2@245,1844 ; U2_fte.15 379.16,1791.3 355.46,1815 295,1815 266,1844 Riterm.2@245,1844
NetRs_fte_2: Rs_fte.2 U2_fte.1 | length 95
  Component Side w10: Rs_fte.2 U2_fte.1
NetRtmr_2: Rtmr.2 U2_fte.14 | length 234.4
  Component Side w9: Rtmr.2 256,1894 317,1833 362.91,1833 398.84,1797.07 U2_fte.14
NRST: CN1.4 U3.7 | length 551.8
  Component Side w9: U3.7 1034.98,626.81 1047.64,614.15 v1(1081,614.15)
  Solder Side w9: v1(1081,614.15) 1174.15,614.15 1195,635 1380.63,635 1400.63,615 CN1.4
PF0: C15.1 U3.5 X1.2 | length 494
  Component Side w9: U3.5 994.75,749.95 994.75,578.4 1066.72,506.43 X1.2 C15.1
PF1: C16.1 U3.6 X1.1 | length 614.7
  Component Side w9: U3.6 1015.29,586.49 1120.64,481.15 1222,481.15 1236.02,467.13 X1.1 C16.1
READ_ADDR: R18_Con.1 U3.55 | length 384.4
  Component Side w9: R18_Con.1 587.4,1062.4 625,1100 735,1100 742.98,1092.02 742.98,1048.17 778.33,1012.81 U3.55
T/A: R8_Con.2 S1_Con.8 U3.50 | length 1039.5
  Component Side w9: R8_Con.2 165,916.54 v3(165,980) ; v3(685,1140) 735,1140 763.76,1111.24 U3.50
  Solder Side w9: v3(165,980) 325,980 432.85,872.15 S1_Con.8 580,1110 610,1140 v3(685,1140)
TCK: CN1.1 U3.49 | length 1379.6
  Component Side w9: v1(750,1190) 750,1153.7 772.78,1130.92 U3.49 ; v1(1340,675) 1340,335.63 1360.63,315 CN1.1
  Solder Side w9: v1(750,1190) 775,1190 995,970 1045,970 v1(1340,675)
TMS: CN1.3 U3.46 | length 1008.1
  Component Side w9: U3.46 956.24,1161.91 1005,1113.15 v1(1005,1023.15)
  Solder Side w9: v1(1005,1023.15) 1091.85,1023.15 1435,680 1476,680 1499,657 1499,534 1480,515
UART2_RX: CN2.1 U3.17 | length 828.9
  Component Side w9: U3.17 1366.63,835.37 1393,809 1393,752 1455,690 1483,690 1527,646 1527,594.43 1565,556.43 CN2.1
UART2_TX: CN2.2 U3.16 | length 938.4
  Component Side w9: U3.16 1257.54,750.81 1319.88,813.15 1357.85,813.15 1375,796 1375,744.54 1447.54,672 1475.54,672 1509,638.54 1509,586.98 1547,548.98 1547,257 CN2.2
USB_DM: CN3.2 U3.44 | length 909.7
  Component Side w9: CN3.2 628.83,1259.28 786.16,1416.61 943.84,1416.61 995.61,1364.85 U3.44
USB_DP: CN3.3 U3.45 | length 884.7
  Component Side w9: CN3.3 622.93,1227.93 793.61,1398.61 936.39,1398.61 975.92,1359.08 U3.45
USB_ID: CN3.4 R17_Con.1 | length 248.1
  Component Side w9: CN3.4 503.41,1196.59 527.6,1172.4 R17_Con.1
USB_VBUS: C1_Con.1 C3_fte.1 CN3.1 P4.2 pad.2@467.39,1915.79 U2_fte.13 | length 1542.8
  Component Side w25: CN3.1 600.63,1290.63 700,1390 v5(700,1515)
  Solder Side w25: pad.2@467.39,1915.79 589.21,1915.79 660,1845 ; P4.2 660,1845 ; v5(700,1515) 700,1805 660,1845
pads on no net: CN3.SHI U1.4 U3.0 U3.2 U3.8 U3.9 U3.11 U3.14 U3.15 U3.54 U3.56 U3.57 U3.58 U3.59 U3.61 U3.62 X2.3 X2.4

## Polygon pours and split planes (outlines as drawn)
+3.3V on Signal Layer 1 "3.3" (solid, pour order 42): -118.11,78.74 1850.39,78.74 1850.39,2440.94 -118.11,2440.95
GND on Signal Layer 2 "gnd" (solid, pour order 40): -118.11,78.74 1850.39,78.74 1850.39,2440.94 -118.11,2440.94
GND on Solder Side "GND" (solid, pour order 38): -118.11,78.74 1850.39,78.74 1850.39,2440.94 -118.11,2440.95
no net on Component Side "gnd" (solid, pour order 44): -118.11,78.74 1850.39,78.74 1850.39,2440.94 -118.11,2440.94
+VIN on Component Side "Top Layer-No Net" (solid, pour order 0): 304,2050.19 675,2050.19 675,1935 574,1935 574,1976 560,1990 304,1990
GND on Component Side "Top Layer-No Net" (solid, pour order 2): 675,2060 675,2340 449,2340 449,2130 324,2130 324,2100 0,2100 0,1925 254,1925 254,2060
NetL1_2 on Component Side "Top Layer-No Net" (solid, pour order 6): 434,2340 303,2340 303,2110 315,2110 315,2140 434,2140
+3.3V on Component Side "Top Layer-No Net" (solid, pour order 4): 0,2340 0,2110 275,2110 275,2145 292,2145 292,2340
USB_VBUS on Component Side "Component Side-No Net" (solid, pour order 26): 409,1945 499,1945 499,1745 409,1745
+VBAT on Component Side "Component Side-No Net" (solid, pour order 28): 347,1720 347,1690 289,1690 289,1590 0,1590 0,1720
+VIN on Component Side "Component Side-No Net" (solid, pour order 30): 432,1675 432,1725 539,1725 574,1760 574,1935 675,1935 675,1786 564,1675
GND on Component Side "GND" (solid, pour order 36): 0,1575 299,1575 299,1685 379,1685 379,1500 0,1500

## Silkscreen, mask and mechanical layers (free items; w line width, h text height)
Mechanical 1:
  the board outline again, w10